# EAGLE board gd_smd (EAGLE 7.2.0)
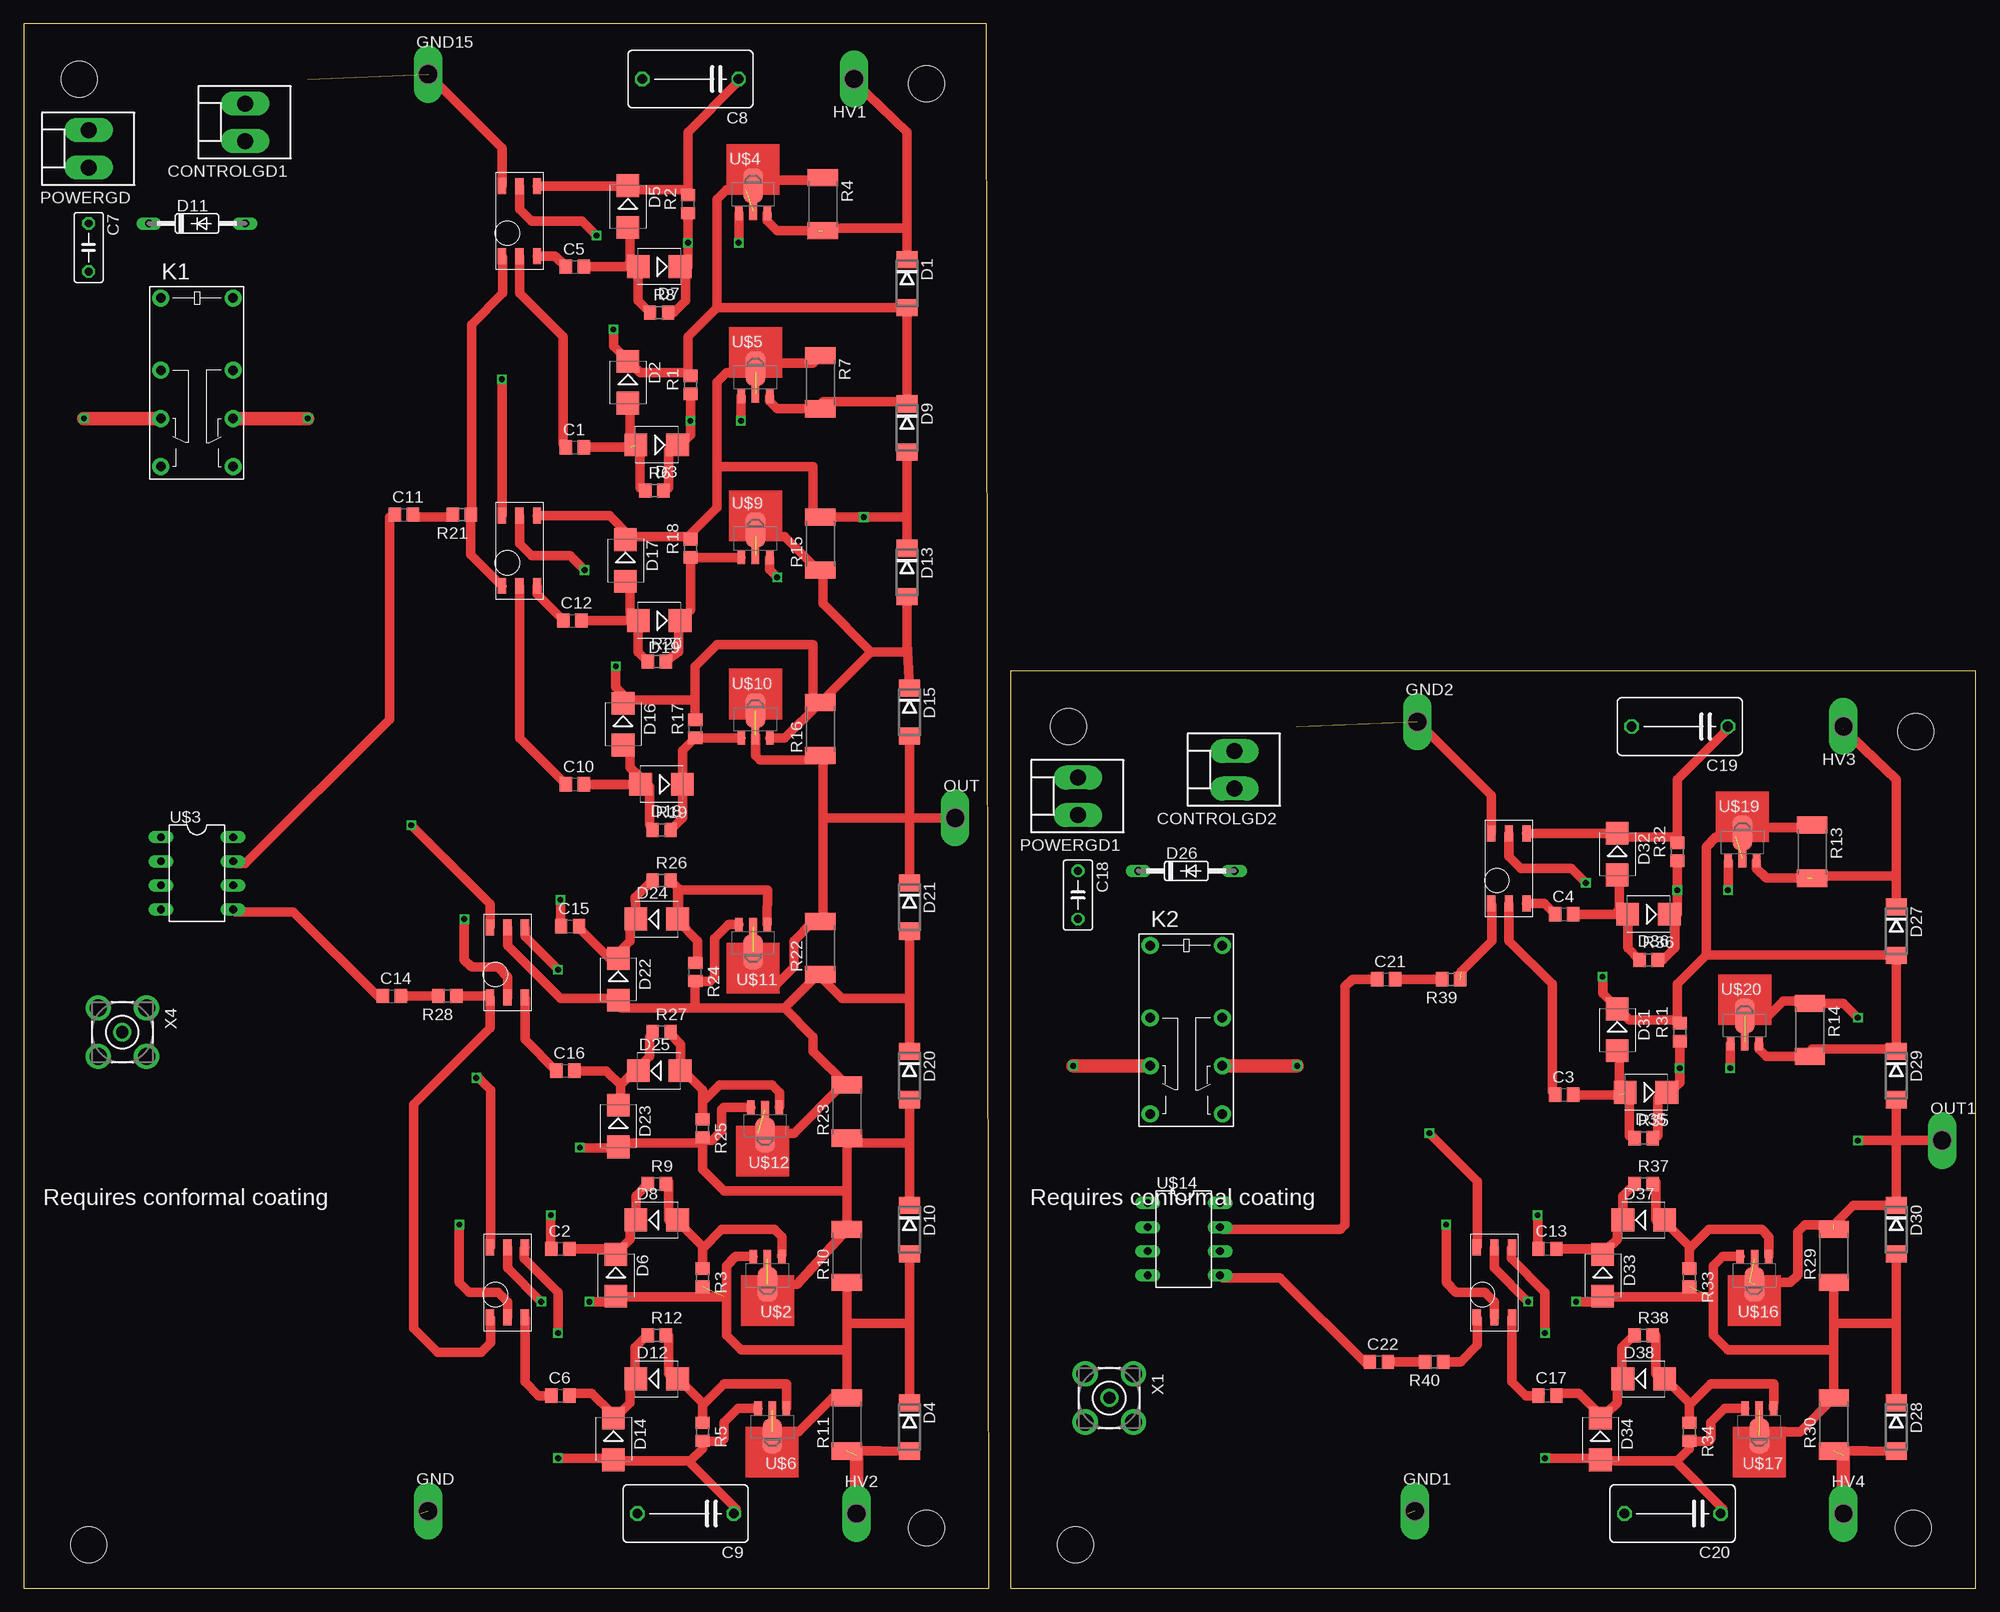
[diagram p0: board, top side]
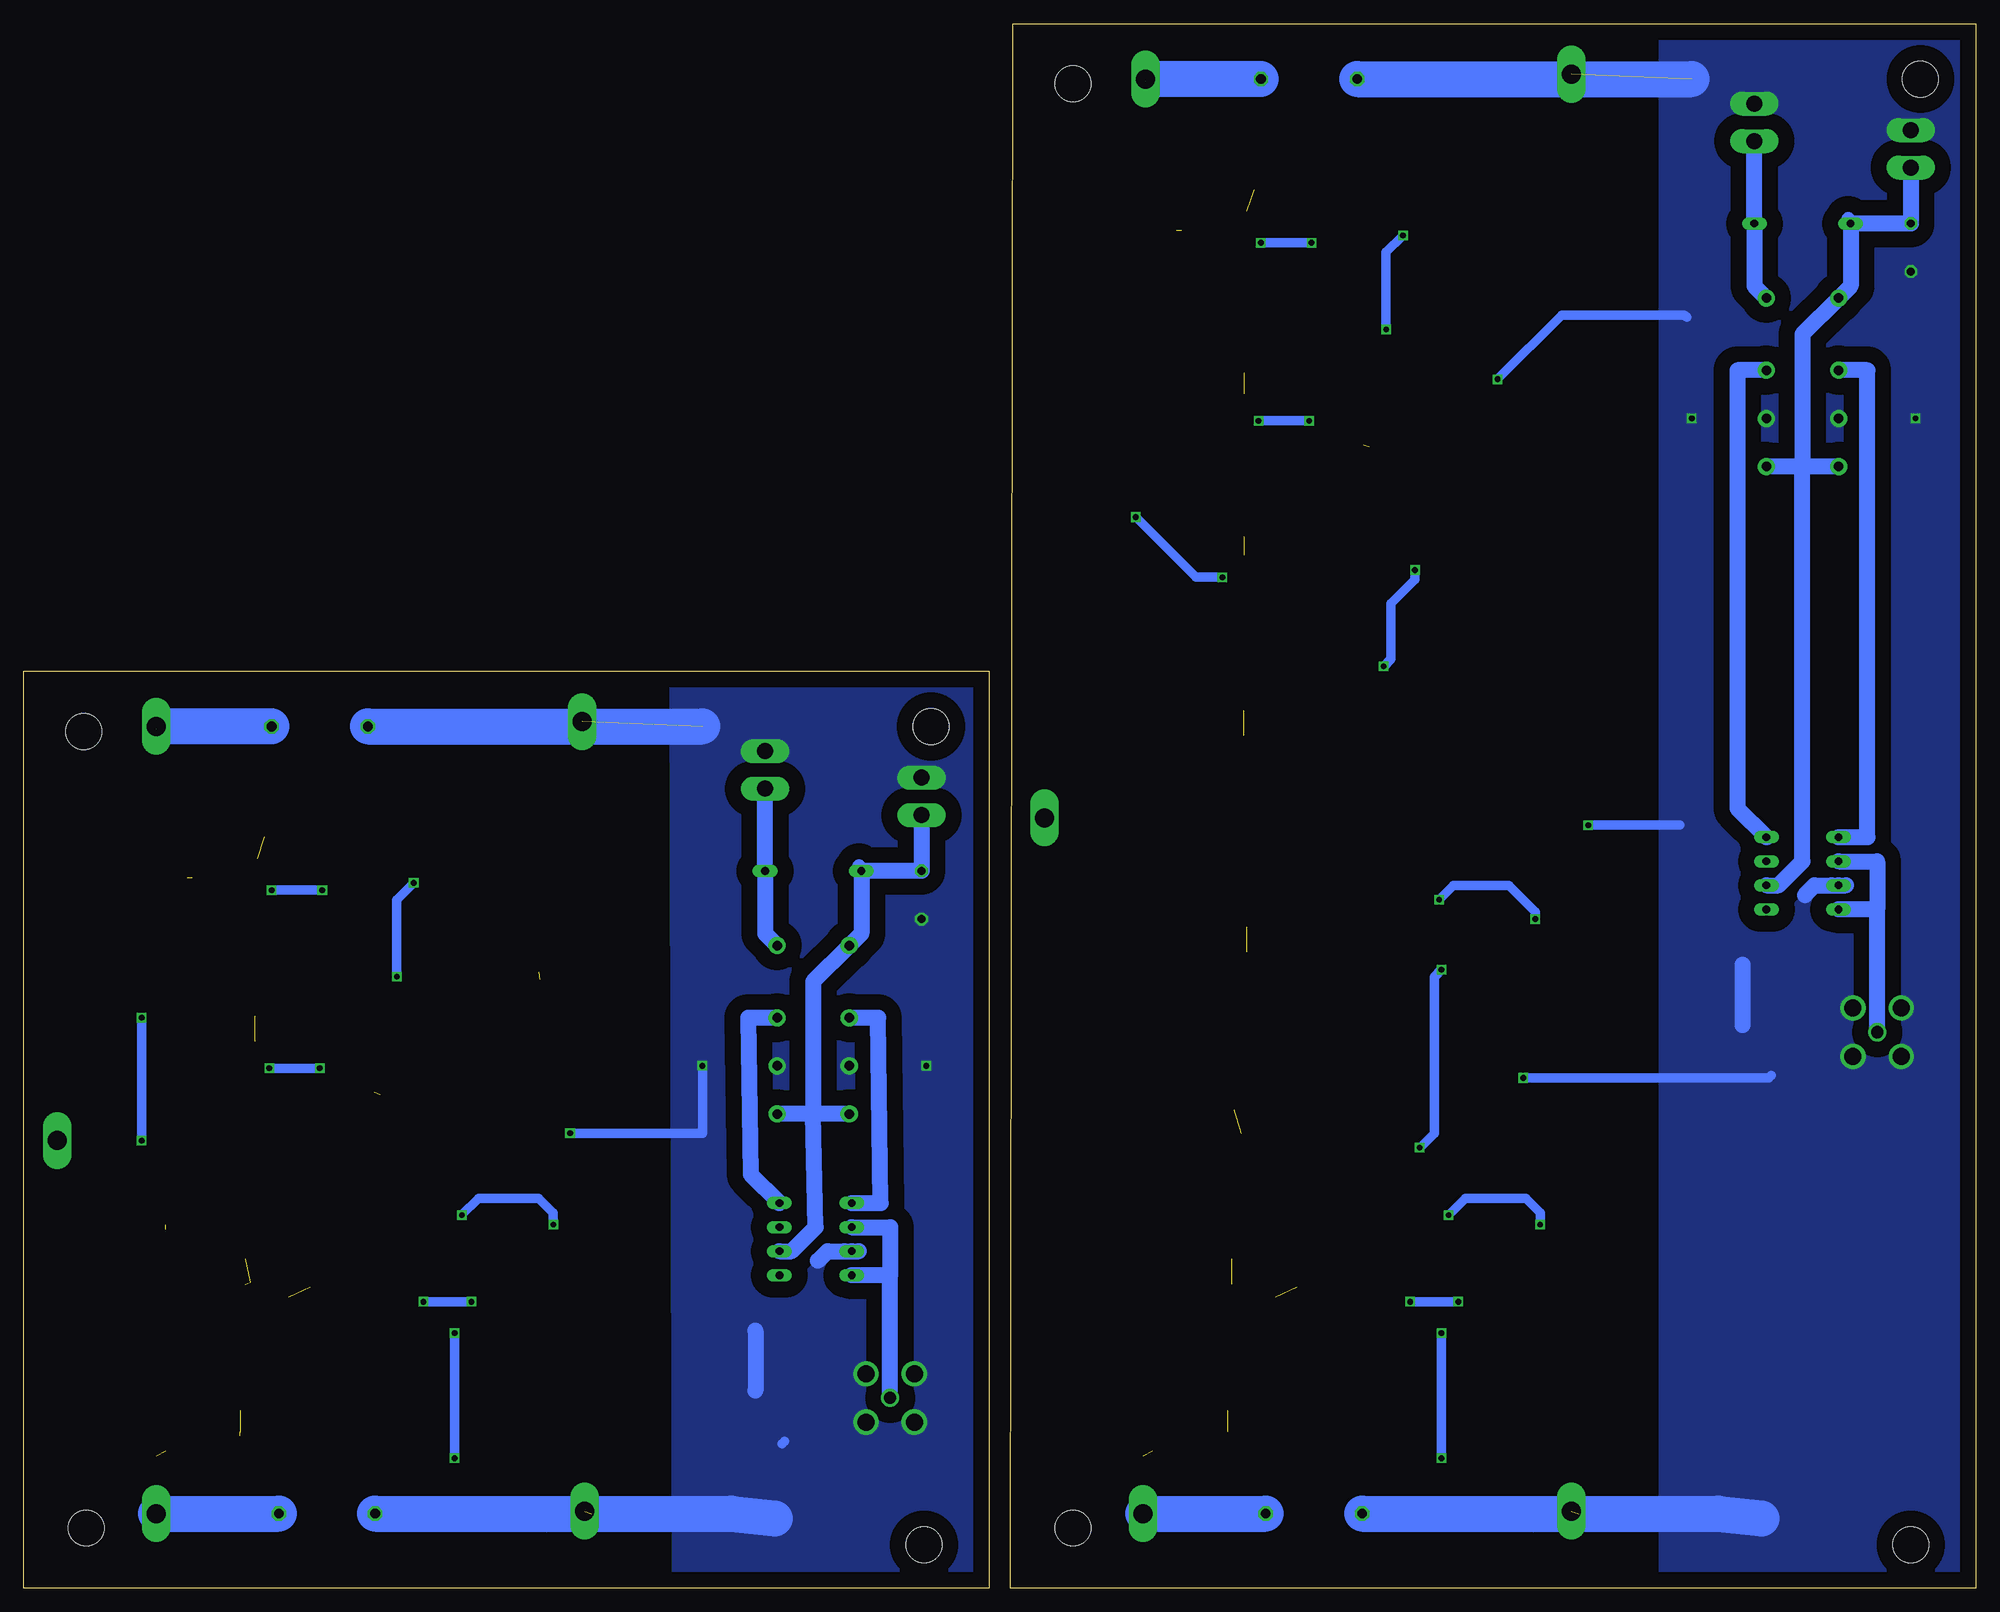
[diagram p1: board, bottom side, seen from below]

Size 205.99 x 165.1 mm. Coordinates in mm from the lower left corner, seen from the top.
Outline: 0,0 101.85,0 101.6,165.1 0,165.1 0,0
Outline: 104.14,0 205.99,0 205.99,96.77 104.14,96.77 104.14,0
Copper layers (1*16): Top 0.035mm / dielectric 1.5mm / Bottom 0.035mm
Design rules "default": minimum track width 10mil, minimum drill 24mil, track to track 8mil, track to pad 8mil, pad to pad 8mil, via to via 8mil, smd to smd 8mil, copper to edge 40mil, drill to drill 8mil, minimum pad ring 10mil, minimum via ring 8mil, stop-mask expansion 4mil, vias tented up to drill 0mil, thermal gap 10mil
Holes 3.8 mm at 95.25,158.75 95.25,6.35 6.86,4.57 5.84,159.26 199.64,90.42 199.39,6.35 111,4.57 110.24,90.93

## Footprints (pad centres in the part's own frame; a part is rotated, then mirrored left to right if it is on the bottom)
C0805 = smd 1.3 x 1.5: 1 -0.95,0; 2 0.95,0
C050-030X075 = drill 0.813 octagon: 1 -2.54,0; 2 2.54,0
C102-064X133 = drill 1.016 octagon: 1 -5.08,0; 2 5.08,0
KK-156-2 = drill 1.7 pad 2.184 long: 1 -1.98,0; 2 1.98,0
DO214AA = smd 1.8 x 2.2: A 2.55,0; C -2.55,0
SMB = smd 2.4 x 2.4: A 2.2,0; C -2.2,0
DO35-10 = drill 0.813 long: A 5.08,0; C -5.08,0
P1-20Y = drill 2.007 pad 2.54 long: TP 0,0
G5V-2 = drill 1 pad 1.8: 1 -8.89,-3.81; 4 -1.27,-3.81; 6 3.81,-3.81; 8 8.89,-3.81; 9 8.89,3.81; 11 3.81,3.81; 13 -1.27,3.81; 16 -8.89,3.81
R0805 = smd 1.3 x 1.5: 1 -0.95,0; 2 0.95,0
R2512 = smd 1.8 x 3.2: 1 -2.8,0; 2 2.8,0
SMD6 = smd 1.676 x 0.889: P$1 -3.696,1.854; P$2 -3.696,0; P$3 -3.696,-1.854; P$4 3.696,-1.854; P$5 3.696,0; P$6 3.696,1.854
SOT89-BCE = smd 0.8 x 1.4: B -1.499,-1.981; E 1.499,-1.981 | smd 0.8 x 1.9: C 0,-1.727 | smd 2.032 x 3.65: C@1 0,0.94
DIL08 = drill 0.813 long: 1 -3.81,-3.81; 2 -1.27,-3.81; 3 1.27,-3.81; 4 3.81,-3.81; 5 3.81,3.81; 6 1.27,3.81; 7 -1.27,3.81; 8 -3.81,3.81
BU-SMA-V = drill 1.27: 1 0,0 | drill 1.778: 2 -2.55,2.55; 3 2.55,2.55; 4 2.55,-2.55; 5 -2.55,-2.55

## Placement (x,y rotation side)
C1  1u  [C0805]  58.17,120.4 0 top
C2  1u  [C0805]  56.64,35.81 0 top
C3  1u  [C0805]  162.56,52.07 0 top
C4  1u  [C0805]  162.56,71.12 0 top
C5  1u  [C0805]  58.17,139.45 0 top
C6  1u  [C0805]  56.64,20.32 0 top
C7  10n  [C050-030X075]  6.86,141.48 270 top
C8  10p  [C102-064X133]  70.36,159.26 180 top
C9  10p  [C102-064X133]  69.85,7.87 180 top
C10  1u  [C0805]  58.17,84.84 0 top
C11  1u  [C0805]  40.13,113.28 0 top
C12  1u  [C0805]  57.91,102.11 0 top
C13  1u  [C0805]  160.78,35.81 0 top
C14  1u  [C0805]  38.86,62.48 0 top
C15  1u  [C0805]  57.66,69.85 0 top
C16  1u  [C0805]  57.15,54.61 0 top
C17  1u  [C0805]  160.78,20.32 0 top
C18  10n  [C050-030X075]  111.25,73.15 270 top
C19  10p  [C102-064X133]  174.75,90.93 180 top
C20  10p  [C102-064X133]  173.99,7.87 180 top
C21  1u  [C0805]  143.76,64.26 0 top
C22  1u  [C0805]  143,23.88 0 top
CONTROLGD1  [KK-156-2]  23.37,154.69 90 top
CONTROLGD2  [KK-156-2]  127.76,86.36 90 top
D1  SMBJ170D-M3/H  [DO214AA]  93.22,137.67 270 top
D2  1SMB5918BT3G  [SMB]  63.75,127.25 270 top
D3  [SMB]  66.8,120.65 180 top
D4  SMBJ170D-M3/H  [DO214AA]  93.47,17.02 270 top
D5  1SMB5918BT3G  [SMB]  63.75,145.8 270 top
D6  1SMB5918BT3G  [SMB]  62.48,33.02 270 top
D7  [SMB]  67.06,139.45 180 top
D8  [SMB]  66.8,38.86 0 top
D9  SMBJ170D-M3/H  [DO214AA]  93.22,122.43 270 top
D10  SMBJ170D-M3/H  [DO214AA]  93.47,37.85 270 top
D11  1N4148DO35-10  [DO35-10]  18.29,144.02 0 top
D12  [SMB]  66.8,22.1 0 top
D13  SMBJ170D-M3/H  [DO214AA]  93.22,107.19 270 top
D14  1SMB5918BT3G  [SMB]  62.23,15.75 270 top
D15  SMBJ170D-M3/H  [DO214AA]  93.47,92.46 270 top
D16  1SMB5918BT3G  [SMB]  63.25,91.19 270 top
D17  1SMB5918BT3G  [SMB]  63.5,108.46 270 top
D18  [SMB]  67.31,84.84 180 top
D19  [SMB]  67.06,102.11 180 top
D20  SMBJ170D-M3/H  [DO214AA]  93.47,54.1 270 top
D21  SMBJ170D-M3/H  [DO214AA]  93.47,71.88 270 top
D22  1SMB5918BT3G  [SMB]  62.74,64.26 270 top
D23  1SMB5918BT3G  [SMB]  62.74,48.77 270 top
D24  [SMB]  66.8,70.61 0 top
D25  [SMB]  67.06,54.61 0 top
D26  1N4148DO35-10  [DO35-10]  122.68,75.69 0 top
D27  SMBJ170D-M3/H  [DO214AA]  197.61,69.34 270 top
D28  SMBJ170D-M3/H  [DO214AA]  197.61,17.02 270 top
D29  SMBJ170D-M3/H  [DO214AA]  197.61,54.1 270 top
D30  SMBJ170D-M3/H  [DO214AA]  197.61,37.85 270 top
D31  1SMB5918BT3G  [SMB]  168.15,58.93 270 top
D32  1SMB5918BT3G  [SMB]  168.15,77.47 270 top
D33  1SMB5918BT3G  [SMB]  166.62,33.02 270 top
D34  1SMB5918BT3G  [SMB]  166.37,15.75 270 top
D35  [SMB]  171.2,52.32 180 top
D36  [SMB]  171.45,71.12 180 top
D37  [SMB]  170.94,38.86 0 top
D38  [SMB]  170.94,22.1 0 top
GND  TPPAD1-20Y  [P1-20Y]  42.67,8.13 0 top
GND1  TPPAD1-20Y  [P1-20Y]  146.81,8.13 0 top
GND2  TPPAD1-20Y  [P1-20Y]  147.07,91.44 0 top
GND15  TPPAD1-20Y  [P1-20Y]  42.67,159.77 0 top
HV1  TPPAD1-20Y  [P1-20Y]  87.63,159.26 180 top
HV2  TPPAD1-20Y  [P1-20Y]  87.88,7.87 0 top
HV3  TPPAD1-20Y  [P1-20Y]  192.02,90.93 180 top
HV4  TPPAD1-20Y  [P1-20Y]  192.02,7.87 0 top
K1  G5V-2  [G5V-2]  18.29,127.25 270 top
K2  G5V-2  [G5V-2]  122.68,58.93 270 top
OUT  TPPAD1-20Y  [P1-20Y]  98.3,81.28 0 top
OUT1  TPPAD1-20Y  [P1-20Y]  202.44,47.24 0 top
POWERGD  [KK-156-2]  6.86,151.89 90 top
POWERGD1  [KK-156-2]  111.25,83.57 90 top
R1  100k  [R0805]  70.36,127 90 top
R2  100k  [R0805]  70.1,146.05 90 top
R3  100k  [R0805]  71.63,32.77 270 top
R4  10M  [R2512]  84.33,146.05 270 top
R5  100k  [R0805]  71.63,16.51 270 top
R6  10  [R0805]  66.55,115.82 0 top
R7  10M  [R2512]  84.07,127.25 270 top
R8  10  [R0805]  67.06,134.62 0 top
R9  10  [R0805]  66.8,42.67 0 top
R10  10M  [R2512]  86.87,35.05 90 top
R11  10M  [R2512]  86.87,17.27 90 top
R12  10  [R0805]  66.8,26.67 0 top
R13  10M  [R2512]  188.72,77.72 270 top
R14  10M  [R2512]  188.47,58.93 270 top
R15  10M  [R2512]  84.07,110.24 90 top
R16  10M  [R2512]  84.07,90.68 90 top
R17  100k  [R0805]  70.87,90.68 90 top
R18  100k  [R0805]  70.36,109.73 90 top
R19  10  [R0805]  67.31,80.01 0 top
R20  10  [R0805]  66.8,97.79 0 top
R21  10  [R0805]  46.23,113.28 180 top
R22  10M  [R2512]  84.07,67.56 90 top
R23  10M  [R2512]  86.87,50.29 90 top
R24  100k  [R0805]  70.87,65.02 270 top
R25  100k  [R0805]  71.63,48.51 270 top
R26  10  [R0805]  67.31,74.68 0 top
R27  10  [R0805]  67.31,58.67 0 top
R28  10  [R0805]  44.7,62.48 180 top
R29  10M  [R2512]  191.01,35.05 90 top
R30  10M  [R2512]  191.01,17.27 90 top
R31  100k  [R0805]  174.75,58.67 90 top
R32  100k  [R0805]  174.5,77.72 90 top
R33  100k  [R0805]  175.77,32.77 270 top
R34  100k  [R0805]  175.77,16.51 270 top
R35  10  [R0805]  170.94,47.5 0 top
R36  10  [R0805]  171.45,66.29 0 top
R37  10  [R0805]  170.94,42.67 0 top
R38  10  [R0805]  170.94,26.67 0 top
R39  10  [R0805]  150.62,64.26 180 top
R40  10  [R0805]  148.84,23.88 180 top
U$1  DA-2320SMD6  [SMD6]  52.32,144.27 90 top
U$2  VN2450  [SOT89-BCE]  78.49,33.02 180 top
U$3  UCC27425  [DIL08]  18.29,75.44 270 top
U$4  VP2450  [SOT89-BCE]  76.96,147.07 0 top
U$5  VP2450  [SOT89-BCE]  77.22,127.76 0 top
U$6  VN2450  [SOT89-BCE]  78.99,17.02 180 top
U$7  DA-2320SMD6  [SMD6]  51.05,32.26 90 top
U$8  DA-2320SMD6  [SMD6]  52.32,109.47 90 top
U$9  VP2450  [SOT89-BCE]  77.22,110.74 0 top
U$10  VP2450  [SOT89-BCE]  77.22,91.69 0 top
U$11  VN2450  [SOT89-BCE]  76.96,68.07 180 top
U$12  VN2450  [SOT89-BCE]  78.23,48.77 180 top
U$13  DA-2320SMD6  [SMD6]  51.05,66.04 90 top
U$14  UCC27425  [DIL08]  122.43,36.83 270 top
U$15  DA-2320SMD6  [SMD6]  156.72,75.95 90 top
U$16  VN2450  [SOT89-BCE]  182.63,33.02 180 top
U$17  VN2450  [SOT89-BCE]  183.13,17.02 180 top
U$18  DA-2320SMD6  [SMD6]  155.19,32.26 90 top
U$19  VP2450  [SOT89-BCE]  181.36,78.74 0 top
U$20  VP2450  [SOT89-BCE]  181.61,59.44 0 top
X1  BU-SMA-V  [BU-SMA-V]  114.55,20.07 270 top
X4  BU-SMA-V  [BU-SMA-V]  10.41,58.67 270 top

## Library data of the parts
C1-C6 C8-C17 C19-C22 = resistor
C7 C18 R1-R40 = rcl
CONTROLGD1 CONTROLGD2 POWERGD POWERGD1 = con-molex; OC_FARNELL: unknown; OC_NEWARK: unknown
D1-D38 = diode
GND GND1 GND2 GND15 HV1-HV4 OUT OUT1 = testpad
K1 K2 = relay; MPN: G5V-2 5DC; OC_FARNELL: 9949488; OC_NEWARK: 78K5703
U$1 U$7 U$8 U$13 U$15 U$18 = trafo
U$2 U$4-U$6 U$9-U$12 U$16 U$17 U$19 U$20 = transistor-fet
U$3 U$14 = texas
X1 X4 = con-coax; OC_FARNELL: unknown; OC_NEWARK: unknown

## Nets
+15V: C7.1 D11.C K1.1 K1.8 K1.9 POWERGD.1 U$3.6
+15V1: C18.1 D26.C K2.1 K2.8 K2.9 POWERGD1.1 U$14.6
ENSW: CONTROLGD1.1 D11.A K1.16
ENSW1: CONTROLGD2.1 D26.A K2.16
GND: C7.2 C8.2 C9.2 CONTROLGD1.2 GND15.TP GND.TP K1.6 K1.11 POWERGD.2 U$1.P$6 U$3.3 U$7.P$6 U$8.P$6 U$13.P$6 X4.2 X4.3 X4.4 X4.5
GND1: C18.2 C19.2 C20.2 CONTROLGD2.2 GND1.TP GND2.TP K2.6 K2.11 POWERGD1.2 U$14.3 U$15.P$6 U$18.P$6 X1.2 X1.3 X1.4 X1.5
N$1: U$3.2 U$3.4 X4.1
N$2: C11.1 U$3.7
N$3: U$14.2 U$14.4 X1.1
N$4: C14.1 U$3.5
N$5: C1.1 U$1.P$2
N$6: C21.1 U$14.7
N$7: C5.1 U$1.P$3
N$8: D3.C R1.1 R6.2 U$5.B
N$9: C22.1 U$14.5
N$10: C1.2 D2.A D3.A R6.1
N$11: D12.A R5.1 R12.2 U$6.B
N$12: D7.C R2.1 R8.2 U$4.B
N$13: D4.C D6.A D10.A R3.2 R10.1 R11.2 U$2.E U$6.C U$6.C@1 U$7.P$5
N$14: K1.4 U$3.1
N$15: K1.13 U$3.8
N$16: C5.2 D5.A D7.A R8.1
N$17: C8.1 D1.C D5.C HV1.TP R2.2 R4.2 U$1.P$4 U$4.E
N$18: D1.A D2.C D9.C R1.2 R4.1 R7.2 U$1.P$5 U$4.C U$4.C@1 U$5.E
N$19: K2.4 U$14.1
N$20: K2.13 U$14.8
N$21: C3.1 U$15.P$2
N$22: C2.1 U$7.P$2
N$23: C6.1 U$7.P$3
N$24: C9.1 D4.A D14.A HV2.TP R5.2 R11.1 U$6.E U$7.P$4
N$25: C2.2 D6.C D8.C R9.1
N$26: D15.A D21.C OUT.TP R16.1 R22.2 U$10.C U$10.C@1 U$11.C U$11.C@1
N$27: C6.2 D12.C D14.C R12.1
N$28: C10.1 U$8.P$2
N$29: C12.1 U$8.P$3
N$30: C12.2 D17.A D19.A R20.1
N$31: C4.1 U$15.P$3
N$32: D9.A D13.C D17.C R7.1 R15.2 R18.2 U$5.C U$5.C@1 U$8.P$4 U$9.E
N$33: D13.A D15.C D16.C R15.1 R16.2 R17.2 U$8.P$5 U$9.C U$9.C@1 U$10.E
N$34: D18.C R17.1 R19.2 U$10.B
N$35: C10.2 D16.A D18.A R19.1
N$36: D19.C R18.1 R20.2 U$9.B
N$37: R21.1 U$1.P$1 U$8.P$1
N$38: C11.2 R21.2
N$39: C13.1 U$18.P$2
N$40: C15.1 U$13.P$2
N$41: C16.1 U$13.P$3
N$42: C15.2 D22.C D24.C R26.1
N$43: C16.2 D23.C D25.C R27.1
N$44: C17.1 U$18.P$3
N$45: C13.2 D33.C D37.C R37.1
N$46: D20.C D21.A D22.A R22.1 R23.2 R24.2 U$11.E U$12.C U$12.C@1 U$13.P$5
N$47: D25.A R25.1 R27.2 U$12.B
N$48: R28.1 U$7.P$1 U$13.P$1
N$49: C14.2 R28.2
N$50: D24.A R24.1 R26.2 U$11.B
N$51: D10.C D20.A D23.A R10.2 R23.1 R25.2 U$2.C U$2.C@1 U$12.E U$13.P$4
N$52: C17.2 D34.C D38.C R38.1
N$53: C4.2 D32.A D36.A R36.1
N$54: C19.1 D27.C D32.C HV3.TP R13.2 R32.2 U$15.P$4 U$19.E
N$55: D28.C D30.A D33.A R29.1 R30.2 R33.2 U$16.E U$17.C U$17.C@1 U$18.P$5
N$56: D27.A D29.C D31.C R13.1 R14.2 R31.2 U$15.P$5 U$19.C U$19.C@1 U$20.E
N$57: D35.C R31.1 R35.2 U$20.B
N$58: C3.2 D31.A D35.A R35.1
N$59: D38.A R34.1 R38.2 U$17.B
N$60: D36.C R32.1 R36.2 U$19.B
N$61: D37.A R33.1 R37.2 U$16.B
N$62: C20.1 D28.A D34.A HV4.TP R30.1 R34.2 U$17.E U$18.P$4
N$63: R39.1 U$15.P$1
N$64: C21.2 R39.2
N$65: R40.1 U$18.P$1
N$66: C22.2 R40.2
N$67: D29.A D30.C OUT1.TP R14.1 R29.2 U$16.C U$16.C@1 U$20.C U$20.C@1
N$251: D8.A R3.1 R9.2 U$2.B

## Tracks (layer width: path | path; a pad name or v marks a point on that pad's centre or on a via)
+15V
  Bottom 1.016: 13.21,144.53 D11.C
  Bottom 1.422: 13.46,144.02 13.46,144.53
  Bottom 1.676: D11.C 13.21,137.41 K1.1 18.29,132.33 18.29,118.36 | 18.29,118.36 18.29,76.71 20.83,74.17 U$3.6 | 18.29,118.36 K1.9 | K1.8 18.29,118.36 | POWERGD.1 C7.1 D11.C | D11.C 13.46,144.02
+15V1
  Bottom 1.016: 117.6,76.2 D26.C
  Bottom 1.422: 117.86,75.69 117.86,76.2
  Bottom 1.676: D26.C 117.6,69.09 K2.1 122.68,64.01 122.68,50.04 | 122.68,50.04 122.43,38.1 124.97,35.56 U$14.6 | 122.68,50.04 K2.9 | K2.8 122.68,50.04 | POWERGD1.1 C18.1 D26.C | D26.C 117.86,75.69
ENSW
  Bottom 1.676: CONTROLGD1.1 D11.A 23.37,137.41 K1.16
ENSW1
  Bottom 1.676: CONTROLGD2.1 D26.A 127.76,69.09 K2.16
GND  (via drill 0.6)  (2 unrouted)
  Top 1.016: v47.75,53.85 48.01,53.85 49.28,52.58 49.28,36.03 U$7.P$6 | U$1.P$6 50.47,151.97 GND15.TP | U$8.P$6 v50.47,127.58 | U$13.P$6 49.2,72.21 v40.89,80.52
  Top 1.422: K1.6 v6.35,123.44 | K1.11 v29.97,123.44
  Bottom 1.016: 15.24,74.17 15.24,74.42 U$3.3 | v47.75,53.85 21.84,53.85 21.59,54.1 | v50.47,127.58 43.69,134.37 30.73,134.37 30.48,134.11 | v40.89,80.52 31.24,80.52
  Bottom 1.422: 41.66,8.13 41.91,7.87
  Bottom 1.676: 24.64,65.79 24.64,59.44 | 18.03,73.15 17.02,74.17 15.24,74.17 U$3.3 13.72,74.17
  Bottom 3.81: 46.69,7.82 27.18,7.85 | 27.18,7.85 22.61,7.37 | C8.2 29.97,159.26 | C9.2 41.91,7.87 27.18,7.87 27.18,7.85
  pour Bottom (isolate 1.676, no thermals): 0,165.1 33.27,165.1 33.27,0 0,0
GND1  (via drill 0.6)  (2 unrouted)
  Top 1.016: U$18.P$6 153.42,36.03 153.42,42.93 v148.34,48.01 | U$15.P$6 154.86,83.64 GND2.TP
  Top 1.422: K2.6 v110.74,55.12 | K2.11 v134.37,55.12
  Bottom 1.016: 119.38,35.56 119.38,35.81 U$14.3 | 125.98,15.24 125.73,15.49 | v148.34,48.01 134.37,48.01 v134.37,55.12
  Bottom 1.422: 145.8,8.13 146.05,7.87
  Bottom 1.676: 128.78,27.18 128.78,20.83 | 122.17,34.54 121.16,35.56 119.38,35.56 U$14.3 117.86,35.56
  Bottom 3.81: 150.82,7.82 131.32,7.85 | 131.32,7.85 126.75,7.37 | C19.2 134.37,90.93 | C20.2 146.05,7.87 131.32,7.87 131.32,7.85
  pour Bottom (isolate 1.676, no thermals): 104.14,96.77 137.67,96.77 137.41,0 104.14,0
N$1
  Bottom 1.676: X4.1 10.41,71.63 | U$3.2 10.41,76.71 10.41,71.63 | 10.41,71.63 U$3.4
N$2
  Top 1.016: U$3.7 22.35,76.45 23.37,76.45 38.61,91.69 38.61,113.03 C11.1
N$3
  Bottom 1.676: X1.1 114.55,33.02 | U$14.2 114.55,38.1 114.55,33.02 | 114.55,33.02 U$14.4
N$4
  Top 1.016: U$3.5 22.35,71.37 28.45,71.37 37.59,62.23 C14.1
N$5
  Top 1.016: U$1.P$2 52.32,136.65 56.9,132.08 56.9,120.72 C1.1
N$6
  Top 1.016: U$14.7 126.49,37.85 138.94,37.85 139.45,38.35 139.45,63.5 140.21,64.26 C21.1
N$7
  Top 1.016: U$1.P$3 56.09,140.58 C5.1
N$8  (via drill 0.6)
  Top 1.016: R6.2 68.07,116.08 68.07,120.14 D3.C 69.34,120.65 70.36,121.67 v70.36,123.19 R1.1 | U$5.B 75.72,123.22 v75.69,123.19
  Bottom 1.016: v75.69,123.19 v70.36,123.19
N$9
  Top 1.016: U$14.5 126.49,32.77 132.59,32.77 141.73,23.62 C22.1
N$10  (1 unrouted)
  Top 1.016: R6.1 65.02,116.08 65.02,120.14 D3.A 64.01,121.16 64.01,124.21 D2.A | C1.2 64.01,120.4
N$11
  Top 1.016: R12.2 68.07,26.67 68.07,22.61 D12.A 69.09,22.1 71.63,19.56 R5.1 71.63,19.3 73.91,21.59 80.52,21.59 80.52,19.79 U$6.B
N$12  (via drill 0.6)
  Top 1.016: R2.1 v70.1,141.99 70.1,139.45 69.85,139.45 | 69.85,139.45 D7.C | R8.2 68.58,134.62 69.85,135.89 69.85,139.45 | U$4.B 75.46,142.01 v75.44,141.99
  Bottom 1.016: v75.44,141.99 v70.1,141.99
N$13  (via drill 0.6)  (2 unrouted)
  Top 1.016: 73.91,30.73 74.17,30.73 74.17,26.67 75.69,25.15 86.87,25.15 | 73.91,30.73 62.74,30.73 D6.A 62.65,30.23 v59.69,30.23 | 86.87,25.15 R11.2 | R11.2 | U$6.C@1 78.99,16.51 81.79,16.51 85.34,20.07 R11.2 | 86.87,27.94 93.47,27.94 | R10.1 86.87,27.94 | 93.47,27.94 D10.A | 93.47,27.94 D4.C | U$7.P$5 51.05,33.78 v54.61,30.23 | U$2.E 75.13,35 74.17,34.04 74.17,30.99 73.91,30.73 | 86.87,27.94 86.87,25.15
  Bottom 1.016: v54.61,30.23 v59.69,30.23
N$14
  Bottom 1.676: 13.97,79.25 U$3.1 11.43,79.25 11.43,128.52 K1.4
N$15
  Bottom 1.676: K1.13 25.15,128.52 25.15,82.3 U$3.8
N$16
  Top 1.016: 64.01,139.95 64.01,143.51 D5.A | 64.01,139.95 64.01,139.45 D7.A 64.86,135.87 R8.1 | C5.2 63.5,139.45 64.01,139.95
N$17  (2 unrouted)
  Top 1.016: 93.22,143.51 84.33,143.51 R4.2 | 70.1,147.57 64.01,147.57 D5.C 63.73,147.97 U$1.P$4 | 70.1,147.57 70.1,153.67 75.18,158.75 C8.1 | 70.1,147.57 R2.2 | 93.22,143.51 93.22,153.67 87.63,159 | 93.22,143.51 D1.C | U$4.E 78.46,144.3 79.5,143.26 83.82,143.26
  Bottom 1.016: 87.12,159.26 87.38,159.77 HV1.TP 87.63,159
  Bottom 3.81: C8.1 87.12,159.26
N$18  (via drill 0.6)  (1 unrouted)
  Top 1.016: 93.22,125.22 84.33,125.22 R7.2 79.5,124.46 78.72,125.25 U$5.E | 93.22,125.22 D9.C | 93.22,125.22 D1.A 73.15,135.13 | 70.1,128.27 65.02,128.27 64.26,129.03 64.01,129.29 | 64.01,129.29 D2.C | R4.1 84.33,148.59 77.22,148.59 U$4.C@1 76.2,147.57 74.17,147.57 73.15,146.56 73.15,135.13 | 70.1,128.27 70.1,132.08 73.15,135.13 | 70.1,128.27 R1.2 | U$1.P$5 52.32,145.54 53.59,144.27 58.93,144.27 v60.45,142.75 | v62.23,132.84 62.23,131.06 64.01,129.29
  Bottom 1.016: v60.45,142.75 62.23,140.97 v62.23,132.84
N$19
  Bottom 1.676: 118.11,40.64 U$14.1 115.57,40.64 115.82,60.2 K2.4
N$20
  Bottom 1.676: K2.13 129.54,60.2 129.29,43.69 U$14.8
N$21
  Top 1.016: U$15.P$2 156.72,68.33 161.29,63.75 161.29,52.39 C3.1
N$22  (via drill 0.6)
  Top 1.016: 55.63,35.75 C2.1 55.63,35.88 v55.63,39.37 | U$7.P$2 51.05,30.23 50.04,31.24 46.99,31.24 45.97,32.26 v45.97,38.35
  Bottom 1.016: v45.97,38.35 45.97,39.62 47.5,41.15 53.85,41.15 v55.63,39.37
N$23
  Top 1.016: 55.88,20.51 C6.1 54.36,20.32 52.91,21.77 U$7.P$3
N$24  (via drill 0.6)  (1 unrouted)
  Top 1.016: D4.A 90.42,14.48 86.11,14.48 R11.1 | 70.23,13.34 75.18,8.38 C9.1 | 70.23,13.34 70.1,13.46 62.99,13.46 62.74,13.49 | 62.74,13.49 D14.A | v56.39,13.72 62.52,13.72 62.74,13.49 | U$6.E 75.39,19 73.91,17.53 73.91,15.75 73.66,15.49 71.69,15.49 R5.2 71.63,14.73 70.23,13.34 | v56.39,26.92 56.39,31.24 52.83,34.8 52.83,35.88 U$7.P$4
  Top 1.422: HV2.TP 87.88,13.97
  Bottom 1.016: 88.39,7.87 HV2.TP | v56.39,13.72 v56.39,26.92
  Bottom 1.676: 87.88,7.62 HV2.TP
  Bottom 3.81: HV2.TP C9.1
N$25
  Top 1.016: C2.2 61.98,35.81 D6.C 62.99,35.81 64.01,36.83 64.01,38.86 D8.C 64.6,41.42 R9.1
N$26  (2 unrouted)
  Top 1.016: 93.47,81.28 OUT.TP | 93.47,81.28 D21.C | 77.22,92.71 U$10.C@1 | U$11.C@1 76.96,63.25 78.99,63.25 81.28,65.53 81.28,68.33 83.31,70.36 R22.2 84.33,70.36 84.33,81.28 | 84.33,81.28 84.33,87.63 R16.1 83.57,87.38 77.72,87.38 77.22,87.88 U$10.C | 84.33,81.28 93.47,81.28 | 93.47,81.28 D15.A
N$27
  Top 1.016: C6.2 57.91,20.57 59.94,20.57 61.98,18.54 D14.C 62.99,18.54 64.01,19.56 64.01,21.59 D12.C 64.52,22.18 64.52,25.4 65.79,26.67 R12.1
N$28
  Top 1.016: U$8.P$2 52.32,89.73 C10.1
N$29
  Top 1.016: U$8.P$3 54.18,104.89 C12.1
N$30
  Top 1.016: 64.39,102.53 64.01,102.87 64.01,105.92 D17.A | 64.39,102.53 D19.A 64.86,98.79 R20.1 | C12.2 63.97,102.11 64.39,102.53
N$31
  Top 1.016: U$15.P$3 160.48,72.25 C4.1
N$32  (via drill 0.6)  (1 unrouted)
  Top 1.016: R7.1 83.31,129.29 77.22,129.29 U$5.C@1 77.22,128.27 74.17,128.27 73.15,127.25 73.15,118.36 | 64.01,111 70.1,111 | 64.01,111 D17.C | D9.A D13.C 93.22,113.03 v88.65,113.03 84.33,113.03 R15.2 83.31,113.03 83.31,118.36 73.15,118.36 | 70.1,111 73.15,114.05 73.15,118.36 | 70.1,111 R18.2 | U$9.E 78.72,107.47 v79.5,106.68 | U$8.P$4 61.84,113.17 64.01,111
  Bottom 1.016: v79.5,106.68 82.3,106.68 v88.65,113.03
N$33  (via drill 0.6)  (1 unrouted)
  Top 1.016: U$9.C@1 77.22,111 80.26,111 83.31,107.95 R15.1 84.33,106.93 84.33,103.89 89.41,98.81 | D15.C 93.22,99.82 D13.A 93.22,98.81 89.41,98.81 | 70.87,93.73 64.01,93.73 63.89,93.67 | 63.89,93.67 D16.C | R16.2 83.31,93.73 83.31,99.57 73.15,99.57 70.87,97.28 70.87,93.73 | 89.41,98.81 84.33,93.73 R16.2 | R17.2 70.87,93.73 | U$10.E 80.31,89.71 R16.2 | U$8.P$5 52.32,110.24 53.59,108.97 57.66,108.97 v59.18,107.44 | v62.48,97.28 62.48,95.08 63.89,93.67
  Bottom 1.016: v59.18,107.44 59.18,106.43 61.72,103.89 61.72,98.04 v62.48,97.28
N$34
  Top 1.016: U$10.B 75.7,89.73 R17.1 69.51,88.37 D18.C 69.51,81.26 R19.2
N$35
  Top 1.016: R19.1 66.04,80.52 66.04,84.58 D18.A | D16.A 64.01,88.65 64.01,86.61 65.02,85.6 D18.A | C10.2 D18.A
N$36
  Top 1.016: R20.2 69.09,98.81 69.09,101.85 D19.C 70.36,103.21 R18.1 75.7,108.78 U$9.B
N$37
  Top 1.016: U$8.P$1 47.18,109.07 R21.1 47.24,113.28 47.24,133.35 50.55,136.65 50.55,140.5 U$1.P$1
N$38
  Top 1.016: C11.2 41.66,113.03 44.7,113.03 R21.2
N$39  (via drill 0.6)
  Top 1.016: 159.77,35.75 C13.1 159.77,35.88 v159.77,39.37 | U$18.P$2 155.19,30.23 154.18,31.24 151.13,31.24 150.11,32.26 v150.11,38.35
  Bottom 1.016: v150.11,38.35 150.11,39.62 151.64,41.15 157.99,41.15 v159.77,39.37
N$40  (via drill 0.6)
  Top 1.016: U$13.P$2 51.05,64.52 50.04,65.53 47.24,65.53 46.48,66.29 v46.48,70.61 | v56.64,72.64 56.64,69.92 C15.1
  Bottom 1.016: v46.48,70.61 46.48,71.37 49.28,74.17 55.12,74.17 v56.64,72.64
N$41
  Top 1.016: U$13.P$3 52.91,57.9 C16.1
N$42
  Top 1.016: R26.1 66.04,74.42 64.52,72.9 D24.C 64.01,70.36 64.01,68.33 62.99,67.31 D22.C 61.98,66.29 58.93,69.34 C15.2
N$43
  Top 1.016: R27.1 66.04,58.17 66.04,56.13 65.02,55.12 D25.C 64.01,54.1 62.99,53.09 | 62.99,53.09 62.99,51.05 D23.C | C16.2 61.47,54.61 62.99,53.09
N$44
  Top 1.016: 160.02,20.51 C17.1 158.5,20.32 157.05,21.77 U$18.P$3
N$45
  Top 1.016: C13.2 166.12,35.81 D33.C 167.13,35.81 168.15,36.83 168.15,38.86 D37.C 168.74,41.42 R37.1
N$46  (1 unrouted)
  Top 1.016: 80.26,61.21 71.12,61.21 | 71.12,61.21 62.99,61.21 D22.A 62.57,62.23 56.64,62.23 51.05,67.82 U$13.P$5 | 80.26,61.21 83.31,64.26 R22.1 84.33,64.26 86.36,62.23 93.47,62.23 | 80.26,61.21 83.31,58.17 83.31,56.64 R23.2 86.36,53.09 81.28,48.01 77.47,48.01 U$12.C@1 | D20.C 93.47,62.23 | 93.47,62.23 D21.A | U$11.E 74.37,70.05 72.9,68.58 72.9,64.52 72.39,64.01 70.93,64.01 R24.2 70.87,61.47 71.12,61.21
N$47
  Top 1.016: 71.63,51.31 71.63,52.58 70.1,54.1 D25.A 69.34,54.7 69.34,57.4 68.26,58.49 R27.2 | R25.1 71.63,51.31 | 71.63,51.31 73.41,53.09 78.99,53.09 79.76,52.32 79.76,50.77 U$12.B
N$48
  Top 1.016: R28.1 49.06,62.48 U$13.P$1 49.2,59.11 41.15,51.05 41.15,27.43 43.69,24.89 48.26,24.89 49.28,25.91 49.28,28.49 U$7.P$1
N$49
  Top 1.016: C14.2 R28.2
N$50
  Top 1.016: R24.1 71.12,66.29 71.12,68.33 69.09,70.36 | 69.09,70.36 D24.A 69,73.66 78.49,73.66 78.46,70.38 U$11.B | 69.09,70.36 69.09,73.85 R26.2
N$51  (via drill 0.6)  (1 unrouted)
  Top 1.016: R25.2 71.12,46.99 62.99,46.99 D23.A 62.65,46.48 v58.67,46.48 | 86.87,46.99 86.87,41.91 | 86.87,41.91 R10.2 81.6,32.08 U$2.C@1 | 86.87,41.91 73.91,41.91 71.63,44.2 R25.2 | 93.47,46.99 D10.C | 93.47,46.99 86.87,46.99 | 86.87,46.99 R23.1 | 93.47,46.99 D20.A | 71.82,47.75 R25.2 | U$13.P$4 52.91,68.76 v56.39,65.28 | U$12.E 73.86,50.75 73.66,50.55 73.66,48.26 72.64,47.24 71.95,47.24 R25.2
  Bottom 1.016: v56.39,65.28 57.15,64.52 57.15,48.01 v58.67,46.48
N$52
  Top 1.016: C17.2 162.05,20.57 164.08,20.57 166.12,18.54 D34.C 167.13,18.54 168.15,19.56 168.15,21.59 D38.C 168.66,22.18 168.66,25.4 169.93,26.67 R38.1
N$53
  Top 1.016: 168.4,71.63 168.4,75.18 D32.A | 168.4,71.63 168.4,71.12 D36.A 169.25,67.54 R36.1 | C4.2 167.89,71.12 168.4,71.63
N$54  (2 unrouted)
  Top 1.016: 197.61,75.18 188.72,75.18 R13.2 | 174.5,79.25 168.4,79.25 D32.C 168.12,79.64 U$15.P$4 | 174.5,79.25 174.5,85.34 179.58,90.42 C19.1 | 174.5,79.25 R32.2 | 197.61,75.18 197.61,85.34 192.02,90.68 | 197.61,75.18 D27.C | U$19.E 182.85,75.97 183.9,74.93 188.21,74.93
  Bottom 1.016: 191.52,90.93 191.77,91.44 HV3.TP 192.02,90.68
  Bottom 3.81: C19.1 191.52,90.93
N$55  (via drill 0.6)  (3 unrouted)
  Top 1.016: 178.05,30.73 178.31,30.73 178.31,26.67 179.83,25.15 191.01,25.15 | 178.05,30.73 166.88,30.73 D33.A 166.79,30.23 v163.83,30.23 | 191.01,25.15 R30.2 187.45,16.51 183.13,16.51 | 191.01,27.94 197.61,27.94 | R29.1 191.01,27.94 | 197.61,27.94 D30.A | 197.61,27.94 D28.C | U$18.P$5 155.19,33.78 v158.75,30.23 | U$16.E 179.27,35 178.31,34.04 178.31,30.99 178.05,30.73 | 191.01,27.94 191.01,25.15
  Bottom 1.016: v158.75,30.23 v163.83,30.23
N$56  (via drill 0.6)  (1 unrouted)
  Top 1.016: 197.61,56.9 188.72,56.9 R14.2 183.9,56.13 183.11,56.92 U$20.E | 197.61,56.9 D29.C | 197.61,56.9 D27.A 197.61,66.8 177.55,66.8 | 174.5,59.94 169.42,59.94 168.4,60.96 | 168.4,60.96 D31.C | R13.1 188.72,80.26 181.61,80.26 U$19.C@1 180.59,79.25 178.56,79.25 177.55,78.23 177.55,66.8 | 174.5,59.94 174.5,63.75 177.55,66.8 | 174.5,59.94 R31.2 | U$15.P$5 156.72,77.22 157.99,75.95 163.32,75.95 v164.85,74.42 | v166.62,64.52 166.62,62.74 168.4,60.96
  Bottom 1.016: v164.85,74.42 166.62,72.64 v166.62,64.52
N$57  (via drill 0.6)
  Top 1.016: R35.2 172.47,47.75 172.47,51.82 D35.C 173.74,52.32 174.75,53.34 v174.75,54.86 R31.1 | U$20.B 180.11,54.89 v180.09,54.86
  Bottom 1.016: v180.09,54.86 v174.75,54.86
N$58  (1 unrouted)
  Top 1.016: R35.1 169.42,47.75 169.42,51.82 D35.A 168.4,52.83 168.4,55.88 D31.A | C3.2 168.4,52.07
N$59
  Top 1.016: R38.2 172.21,26.67 172.21,22.61 D38.A 173.23,22.1 175.77,19.56 R34.1 175.77,19.3 178.05,21.59 184.66,21.59 184.66,19.79 U$17.B
N$60  (via drill 0.6)
  Top 1.016: R32.1 v174.5,73.66 174.5,71.12 174.24,71.12 | 174.24,71.12 D36.C | R36.2 172.97,66.29 174.24,67.56 174.24,71.12 | U$19.B 179.86,73.69 v179.83,73.66
  Bottom 1.016: v179.83,73.66 v174.5,73.66
N$61
  Top 1.016: R37.2 172.21,42.93 172.21,38.86 D37.A 173.14,38.69 175.77,36.07 R33.1 175.77,35.81 177.8,37.85 183.39,37.85 184.15,37.08 184.15,35.28 U$16.B
N$62  (via drill 0.6)  (1 unrouted)
  Top 1.016: D28.A 194.56,14.48 190.25,14.48 R30.1 | 174.37,13.34 179.32,8.38 C20.1 | 174.37,13.34 174.24,13.46 167.13,13.46 166.88,13.49 | 166.88,13.49 D34.A | v160.53,13.72 166.66,13.72 166.88,13.49 | U$17.E 179.53,19 178.05,17.53 178.05,15.75 177.8,15.49 175.83,15.49 R34.2 175.77,14.73 174.37,13.34 | v160.53,26.92 160.53,31.24 156.97,34.8 156.97,35.88 U$18.P$4
  Top 1.422: HV4.TP 192.02,13.97
  Bottom 1.016: 192.53,7.87 HV4.TP | v160.53,13.72 v160.53,26.92
  Bottom 1.676: 192.02,7.62 HV4.TP
  Bottom 3.81: HV4.TP C20.1
N$63  (1 unrouted)
  Top 1.016: 151.64,65.02 154.94,68.33 154.94,72.17 U$15.P$1
N$64
  Top 1.016: R39.2 C21.2
N$65
  Top 1.016: R40.1 151.64,23.88 153.42,25.65 153.42,28.49 U$18.P$1
N$66
  Top 1.016: C22.2 R40.2
N$67  (via drill 0.6)  (4 unrouted)
  Top 1.016: U$20.C@1 184.07,60.38 185.67,61.98 188.22,61.98 R14.1 192.02,61.73 v193.55,60.2 | v193.55,47.24 197.61,47.24 | D29.A 197.61,47.24 | 197.61,47.24 D30.C 193.05,40.4 191.01,38.35 187.96,38.35 187.2,37.59 187.2,33.02 186.44,32.26 182.12,32.26 | OUT1.TP 197.61,47.24
  Bottom 1.016: v193.55,60.2 v193.55,47.24
N$251
  Top 1.016: R9.2 68.07,42.93 68.07,38.86 D8.A 69,38.69 71.63,36.07 R3.1 71.63,35.81 73.66,37.85 79.25,37.85 80.01,37.08 80.01,35.28 U$2.B
(copper drawn outside any net)
  shapes: Top area x14

## Text on the board
tPlace: Requires conformal coating | Requires conformal coating